# Altium PCB MAGI'sWiFi.PcbDoc
Units mil, origin at the board's own origin, x right, y up, seen from the top; angles counter-clockwise.
Board outline 6000 x 4000 mil, 2 copper layers (Top Layer, Bottom Layer); 20 components, 27 nets, 125 pads, 145 vias.
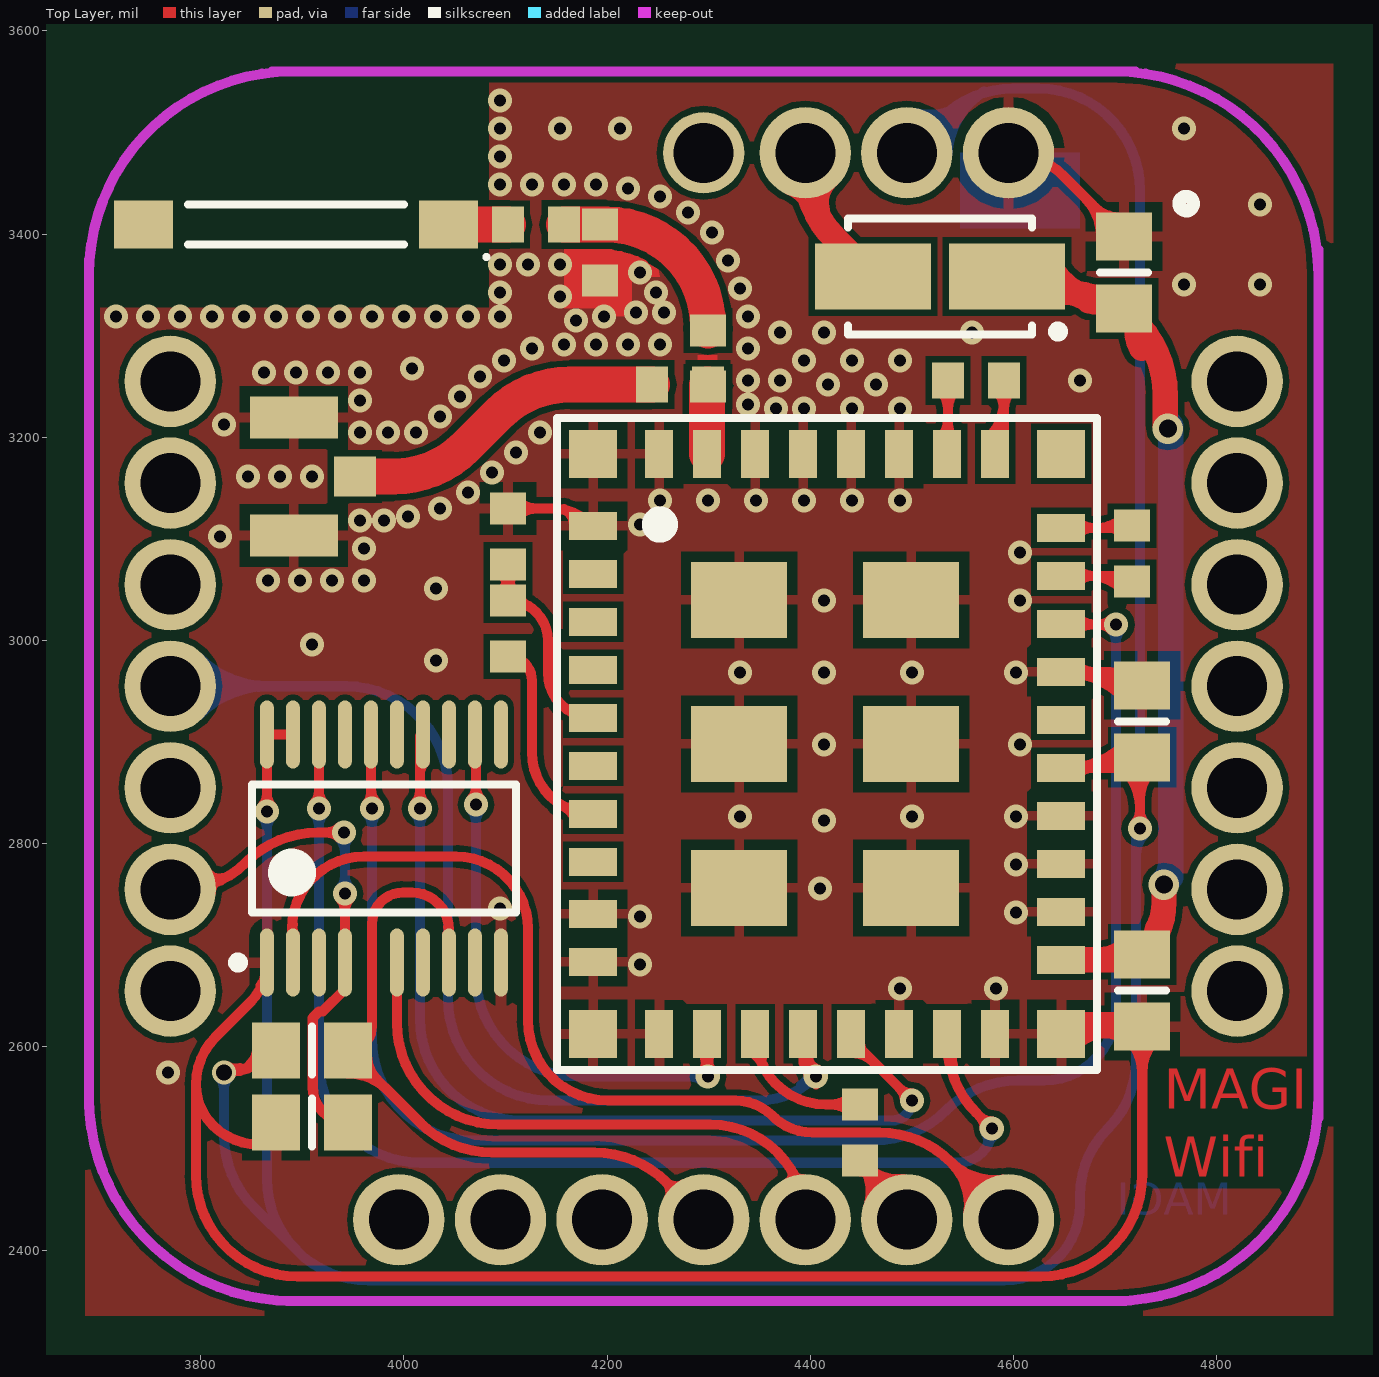
[diagram p0: Top Layer view]
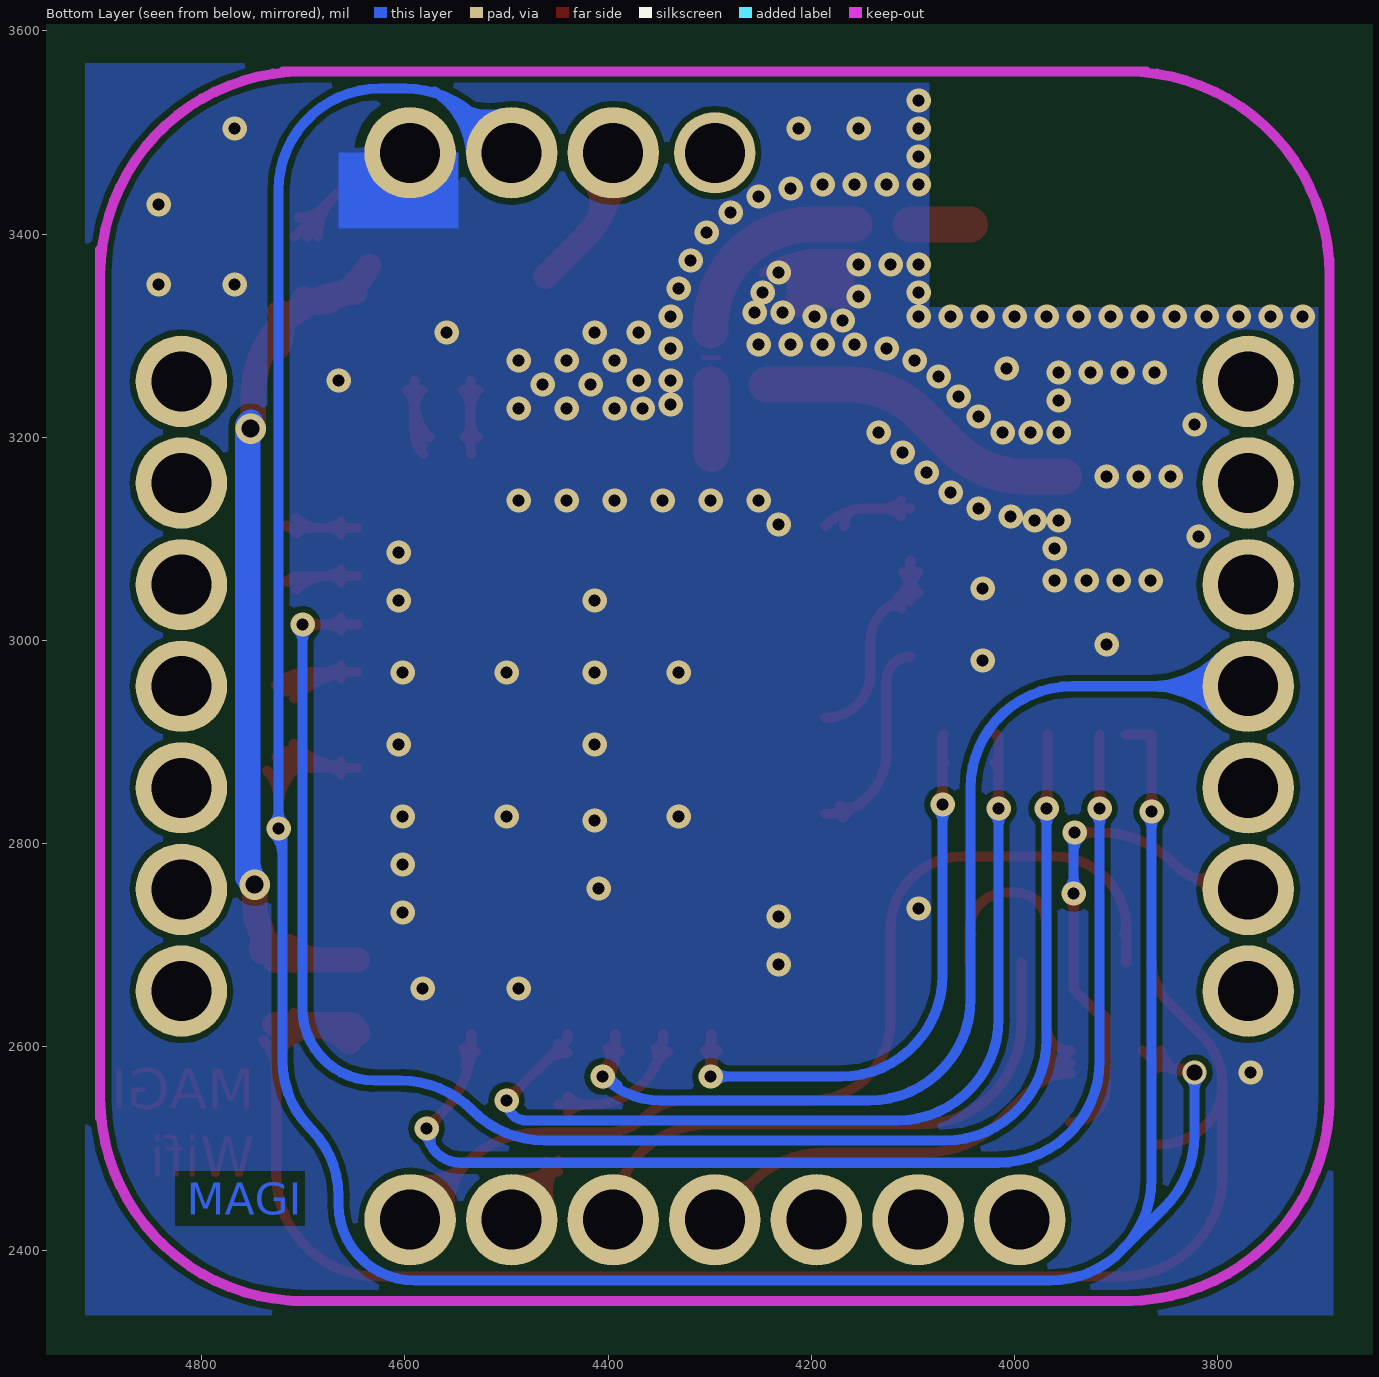
[diagram p1: Bottom Layer view, seen from below]

## Layer stack, top to bottom
Top Layer: signal copper 1.4
Dielectric: dielectric 12.6, FR-4, Dk 4.8
Bottom Layer: signal copper 1.4

## Board outline
1000,1000 7000,1000 7000,5000 1000,5000

## Design rules (kind name [scope] priority, off if disabled: settings)
Clearance Clearance_1 [InPolygon vs InNetClass('RF')] p1: gap=6
Clearance [All] p2: gap=6
ComponentClearance [All] p1 off: gap=10 collisioncheckmode=3 verticalgap=10 showdistances=FALSE
PolygonConnect [All] p1: connectstyle=Relief reliefconductorwidth=10 reliefentries=4 polygonreliefangle="90 Angle" airgapwidth=10
RoutingVias [All] p1: holewidth=28 width=50 viastyle="Through Hole" minholewidth=12 minwidth=24 maxholewidth=157.48 maxwidth=196.85
SolderMaskExpansion [All] p1: expansion=4
Width [All] p1: maxlimit=100 minlimit=6 preferedwidth=20
27 further rules are at their usual default settings.

## Classes and differential pairs
net class RF: NetC1_1 NetC1_2 NetC2_1 NetC3_2

## Components (designator, comment, footprint, x,y, rotation, side; value= is the part's Value field where it differs from the comment)
C1 "CAP_1" 1608[0603] 4129.92,3409.45 r180 top
C2 "CAP_1" 1608[0603] 4299.21,3277.56 r90 top
C3 "CAP_1" 1608[0603] 4271.65,3251.97 r180 top
C4 "CAP_1" 6-0805_N 4726.61,2920.51 r90 top
C5 "CAP_1" 6-0805_N 4726.61,2655.51 r270 top
D1 "DIODE_1" SMA 4527.56,3358.27 r180 top
E1 "1020B5812-01" AT8010-E2R9HAA 3893.7,3409.45 r180 top
E2 "ANT-2.45-CHP-B" U.FL 3901.57,3161.42 r90 top
J1 "MAGI-M8" MAGI-M8 4295,2955 r0 top
L2 "Coil" 1608[0603] 4192.91,3381.89 r90 top
M1 "CC3000" CC3000MOD 4416.61,2945.51 r0 top
R1 "RES1_1" 6-0805_N 3909.45,2525.59 r180 top
R2 "RES1_1" 6-0805_N 3909.45,2596.46 r180 top
R3 "RES1_1" 1608[0603] 4562.99,3255.91 r180 top
R4 "RES1_1" 1608[0603] 4716.61,3085.51 r270 top
R5 "RES1_1" 1608[0603] 4102.36,3102.36 r270 top
R6 "RES1_1" 1608[0603] 4102.36,3011.81 r270 top
R7 "RES1" 6-0805_N 4708.66,3362.2 r270 top
R8 "RES1_1" 1608[0603] 4448.82,2515.75 r90 top
U1 "SN74LVC244A" SN74LVC244APWRG 3980.32,2795.28 r90 top

## Footprints (in the part's own frame and the unit in brackets; to place one, negate y for a bottom-side part, rotate by r counter-clockwise, add the part's x,y. Pads: shape width x height; smd on the part's side, far side on the other; paste and mask are expansions set on the pad)
6-0805_N [mm] "Chip Resistor, Body 2.0x1.2mm, IPC Medium Density"
  rect 1.2x1.4 smd: 1(-0.9,0) 2(0.9,0)
  silkscreen extent 0,-0.6 0,0.6, body extent -1.07,-0.7 1.07,0.7, height 0.7
1608[0603] [mm] "Chip Capacitor, Body 1.6x0.8mm, IPC High Density"
  rect 0.8x0.9 smd: 1(-0.7,0) 2(0.7,0)
  body extent -0.87,-0.48 0.87,0.48, height 1.3
AT8010-E2R9HAA [mm] "Chip Inductor, 2-Leads, Body 8.00x1.00mm, IPC Medium Density"
  rect 1.48x1.2 smd: 1(-3.81,0) 2(3.81,0)
  silkscreen extent -4.81,-0.5 2.7,0.86, body extent -4.1,-0.6 4.1,0.6, height 1.2
CC3000MOD [mm]
  rect 1.2x0.7 smd: 1(-5.85,4.25) 2(-5.85,3.05) 3(-5.85,1.85) 4(-5.85,0.65) 5(-5.85,-0.55) 6(-5.85,-1.75) 7(-5.85,-2.95) 8(-5.85,-4.15) 9(-5.85,-5.45) 10(-5.85,-6.65) 19(5.85,-6.6) 20(5.85,-5.4) 21(5.85,-4.2) 22(5.85,-3) 23(5.85,-1.8) 24(5.85,-0.6) 25(5.85,0.6) 26(5.85,1.8) 27(5.85,3) 28(5.85,4.2)
  rect 0.7x1.2 smd: 11(-4.2,-8.45) 12(-3,-8.45) 13(-1.8,-8.45) 14(-0.6,-8.45) 15(0.6,-8.45) 16(1.8,-8.45) 17(3,-8.45) 18(4.2,-8.45) 29(4.2,6.05) 30(3,6.05) 31(1.8,6.05) 32(0.6,6.05) 33(-0.6,6.05) 34(-1.8,6.05) 35(-3,6.05) 36(-4.2,6.05)
  rect 2.4x1.9 smd: 37(-2.2,2.4) 38(-2.2,-1.2) 39(-2.2,-4.8) 40(2.1,2.4) 41(2.1,-1.2) 42(2.1,-4.8)
  rect 1.2x1.2 smd: 43(-5.85,6.05) 44(-5.85,-8.45) 45(5.85,-8.45) 46(5.85,6.05)
  silkscreen extent -6.75,-9.35 6.75,6.95
MAGI-M8 [mil]
  round 90 hole 59.06: 1(300,525) 2(200,525) 3(100,525) 8(-525,300) 9(-525,200) 10(-525,100) 11(-525,0) 12(-525,-100) 13(-525,-200) 14(-525,-300) 15(-300,-525) 16(-200,-525) 17(-100,-525) 18(0,-525) 19(100,-525) 20(200,-525) 21(300,-525) 22(525,-300) 23(525,-200) 24(525,-100) 25(525,0) 26(525,100) 27(525,200) 28(525,300)
  round 80 hole 59.06: 4(0,525)
  Keep-Out Layer lines w10: -605,-415 -605,290 -605,420 ; -605,-405 ccw(c-405,-405) -405,-605 ; -605,405 cw(c-405,405) -405,605 ; -425,605 425,605 ; -410,-605 415,-605 ; 405,-605 ccw(c405,-405) 605,-405 ; 405,605 cw(c405,405) 605,405 ; 605,-425 605,430
  silkscreen extent 468,468 482,482
SMA [mm] "Doide"
  rect 2.9x1.65 smd: 1(-1.675,0) 2(1.675,0)
  silkscreen extent -3.08,-1.45 2.3,1.5, body extent -2.3,-1.45 2.3,1.45, height 2.44
SN74LVC244APWRG [mm]
  oval 1.7x0.35 smd: 1(-2.85,2.925) 2(-2.85,2.275) 3(-2.85,1.625) 4(-2.85,0.975) 6(-2.85,-0.325) 7(-2.85,-0.975) 8(-2.85,-1.625) 9(-2.85,-2.275) 10(-2.85,-2.925) 11(2.85,-2.925) 12(2.85,-2.275) 13(2.85,-1.625) 14(2.85,-0.975) 15(2.85,-0.325) 16(2.85,0.325) 17(2.85,0.975) 18(2.85,1.625) 19(2.85,2.275) 20(2.85,2.925)
  silkscreen extent -2.97,-3.3 1.6,3.77, body extent -2.25,-3.3 2.25,3.3, height 1.2
U.FL [mm]
  rect 1x1.05 smd: 1(0,-1.27)
  rect 1.05x2.2 smd: 2(-1.475,0.255) 2(1.475,0.255)

## Part data
C1 C2 C3 C4 C5: "Capacitor"
D1: "Diode"
E1: "Flavus GSM Snap-In Antenna, 800/900/1800/1900 MHz, 0.8mm PCB Thickness"
E2: "2.45GHz Ultra-Compact, LTCC, Chip Antenna, Bulk"
U1: library part 74LVC244

## Via types
v1: diameter 24, hole 12, Top Layer to Bottom Layer, 142 vias
v2: diameter 30, hole 18, Top Layer to Bottom Layer, 2 vias
v3: diameter 23.62, hole 15.75, Top Layer to Bottom Layer, 1 vias

## Nets (pads, with @x,y where several pads share a name; then routed paths per layer and width w, separated by ;. In a path a pad name is that pad's centre, name@x,y a point inside that pad or via, vN(x,y) a via of type N, cw(c..) or ccw(c..) an arc to the next point about the centre after c; other vN are vias at no path point)
3.3V: C4.1 J1.2 M1.23 R2.2 U1.19 U1.20 | length 3827.5
  Top Layer w10: v3(3822.83,2574.8) ccw(c3822.83,2646.09) 3873.24,2595.68 R2.2 ; v3@3826.24,2580.7 ccw(c3834.46,2594.94) 3838.72,2579.06 ccw(c3842.97,2563.18) v3@3828.73,2571.4 ; R2.2@3855.75,2596.15 cw(c3829.44,2601.37) 3842.85,2578.14 cw(c3852.41,2561.58) R2.2@3863.35,2577.25 ; v1@3860.21,2836.64 ccw(c3848.26,2848.59) 3865.16,2848.59 ccw(c3882.06,2848.59) v1@3870.11,2836.64 ; v1(3865.16,2831.69) U1.20 U1.19 ; M1.23 4701.43,2874.65 ccw(c4701.43,2910.27) C4.1@4726.58,2885.04 ; M1.23@4652.53,2874.65 ccw(c4652.53,2955.22) C4.1@4709.51,2898.25 ; M1.23@4662.98,2868.44 cw(c4677.97,2853.45) 4677.97,2874.65 cw(c4677.97,2895.84) M1.23@4662.98,2880.85 ; 4676.67,2874.65 ccw(c4676.67,2931.08) C4.1@4716.58,2891.18 ; C4.1@4700.82,2874.65 ccw(c4700.82,2906.94) C4.1@4723.65,2884.1 ; C4.1@4709.51,2871.91 cw(c4673.54,2835.94) 4724.41,2835.94 ; C4.1@4716.58,2878.98 cw(c4697.68,2860.08) 4724.41,2860.08 ; v1@4719.46,2819.91 ccw(c4707.51,2831.86) 4724.41,2831.86 ccw(c4741.31,2831.86) v1@4729.36,2819.91 ; v1(4724.41,2814.96) C4.1@4724.41,2879.76 ; 4724.41,2844.3 cw(c4763.45,2844.3) C4.1@4735.84,2871.91
  Bottom Layer w10: v3@3818.02,2569.99 cw(c3806.39,2558.36) 3822.83,2558.36 cw(c3839.28,2558.36) v3@3827.65,2569.99 ; v3(3822.83,2574.8) 3822.83,2512.99 ccw(c3922.83,2512.99) 3852.12,2442.28 3888.3,2406.1 ; v1@3860.21,2826.74 cw(c3848.26,2814.79) 3865.16,2814.79 cw(c3882.06,2814.79) v1@3870.11,2826.74 ; v1(3865.16,2831.69) 3865.16,2470.08 ccw(c3965.16,2470.08) 3888.3,2406.1 ; J1.2 4529.02,3514.02 cw(c4599.73,3443.31) 4599.73,3543.31 4624.41,3543.31 cw(c4624.41,3443.31) 4724.41,3443.31 v1(4724.41,2814.96) 4720.47,2811.02 4720.47,2586.22 cw(c4626.38,2586.22) 4692.91,2519.68 ccw(c4759.45,2453.15) 4665.35,2453.15 4665.35,2444.88 cw(c4590.55,2444.88) 4590.55,2370.08 3965.16,2370.08 cw(c3965.16,2470.08) 3901.18,2393.22 3888.3,2406.1 ; J1.2@4501.68,3509.25 ccw(c4509.66,3544.21) 4528.74,3513.84 ; J1.2@4503.9,3519 ccw(c4517.26,3577.5) 4549.18,3526.69 ; J1.2@4514.98,3479.14 cw(c4565.98,3476.96) 4538.82,3520.18 ; J1.2@4524.97,3478.72 cw(c4589.09,3475.97) 4554.95,3530.31 ; J1.2@4534.96,3478.29 cw(c4612.21,3474.98) 4571.08,3540.44 ; v1@4719.46,2819.91 ccw(c4707.51,2831.86) 4724.41,2831.86 ccw(c4741.31,2831.86) v1@4729.36,2819.91 ; 4720.47,2788.56 cw(c4750.81,2788.56) v1@4729.36,2810.01
5V: D1.2 J1.3 | length 220.1
  Top Layer w25: J1.3@4382.51,3450 cw(c4366.45,3411.42) 4406.81,3422.24 cw(c4439.23,3430.92) J1.3@4416.76,3455.86 ; J1.3 4395,3466.3 ccw(c4495,3466.3) 4424.29,3395.59 D1.2
CLK_3V: M1.17 U1.18 | length 1306.7
  Top Layer w10: v1@3911.39,2839.6 ccw(c3899.44,2851.55) 3916.34,2851.55 ccw(c3933.24,2851.55) v1@3921.29,2839.6 ; v1(3916.34,2834.65) U1.18 ; M1.17@4530.11,2595.52 cw(c4518.09,2576.09) 4540.33,2581.34 ; M1.17 4534.72,2605.1 ccw(c4634.72,2605.1) 4564.01,2534.39 v1(4578.72,2519.68) ; 4539.8,2583.61 cw(c4558.82,2588.1) M1.17@4542.19,2598.38 ; v1@4571.72,2519.68 ccw(c4554.82,2519.68) 4566.77,2531.63 ccw(c4578.72,2543.58) v1@4578.72,2526.68
  Bottom Layer w10: v1@3911.39,2829.7 cw(c3899.44,2817.75) 3916.34,2817.75 cw(c3933.24,2817.75) v1@3921.29,2829.7 ; v1(3916.34,2834.65) 3916.34,2586 ccw(c4016.34,2586) 4016.34,2486 4545.03,2486 ccw(c4545.03,2519.68) v1(4578.72,2519.68) ; v1@4572.66,2516.18 cw(c4558.02,2507.74) 4574.34,2503.36 cw(c4590.67,2498.99) v1@4582.22,2513.62
CLK_5V: J1.21 U1.2 | length 1205.6
  Top Layer w10: 3890.59,2720.33 ccw(c3903.12,2717.61) U1.2@3892.34,2710.67 ; U1.2 cw(c3890.75,2684.06) 3889.76,2684.06 3889.76,2716.54 ; U1.2@3892.08,2710.99 cw(c3897.57,2716.53) 3889.76,2716.53 ; J1.21@4555.41,2435.72 ccw(c4496.34,2444.25) 4538.54,2486.46 ; J1.21@4565.31,2434.29 ccw(c4521.01,2440.69) 4552.66,2472.34 ccw(c4584.31,2503.99) J1.21@4590.71,2459.69 ; J1.21@4589.28,2469.59 cw(c4580.75,2528.66) 4538.54,2486.46 ; J1.21 4538.54,2486.46 ; 3889.76,2716.54 cw(c3960.63,2716.54) 3960.63,2787.4 4051.18,2787.4 cw(c4051.18,2716.54) 4122.05,2716.54 4122.05,2625.98 ccw(c4200.79,2625.98) 4200.79,2547.24 4326.2,2547.24 cw(c4326.2,2495.65) 4362.68,2532.13 ccw(c4402.23,2571.68) 4369.66,2526.21 ccw(c4402.23,2571.68) 4402.23,2515.75 4467.83,2515.75 cw(c4467.83,2415.75) 4538.54,2486.46
CS_3V: M1.12 U1.12 | length 736.3
  Top Layer w10: v1@4065.92,2843.53 ccw(c4053.97,2855.48) 4070.87,2855.48 ccw(c4087.77,2855.48) v1@4075.82,2843.53 ; U1.12@4068.55,2879.57 cw(c4062.94,2873.97) 4070.87,2873.97 ; U1.12 cw(c4067.51,2905.1) 4070.87,2905.1 v1(4070.87,2838.58) ; M1.12@4292.3,2596.78 cw(c4277.31,2581.8) 4298.5,2581.8 cw(c4319.7,2581.8) M1.12@4304.71,2596.78 ; v1@4293.76,2575.26 ccw(c4281.91,2584.84) 4296.63,2588.79 ; v1@4294.25,2575.81 ccw(c4283.99,2586.07) 4298.5,2586.07 ; M1.12@4298.5,2589.45 ccw(c4317.79,2589.45) v1@4304.15,2575.81 ; M1.12 4298.5,2570.87 v1(4299.2,2570.86) ; 4299.77,2586.53 ccw(c4308.82,2584.1) v1@4303.32,2576.53
  Bottom Layer w10: v1@4065.92,2833.63 cw(c4053.97,2821.68) 4070.87,2821.68 cw(c4087.77,2821.68) v1@4075.82,2833.63 ; v1(4070.87,2838.58) 4070.87,2670.86 ccw(c4170.87,2670.86) 4170.87,2570.86 v1(4299.2,2570.86) ; v1@4294.25,2565.91 ccw(c4282.3,2553.96) 4282.3,2570.86 ccw(c4282.3,2587.76) v1@4294.25,2575.81
CS_5V: J1.18 R2.1 U1.8 | length 833.7
  Top Layer w10: R2.1@3944.88,2573.9 cw(c3944.88,2519.44) 3983.39,2557.95 ; R2.1@3944.88,2583.9 cw(c3944.88,2553.58) R2.1@3966.32,2575.02 ; R2.1@3963.5,2592.52 ccw(c3998.96,2592.52) 3973.89,2567.45 ; U1.8@4042.65,2710.59 ccw(c4034.18,2715.48) 4043.63,2718.01 ; U1.8 4044.29,2715.55 ccw(c4007.87,2715.55) 4007.87,2751.97 3999.21,2751.97 ccw(c3999.21,2721.26) 3968.5,2721.26 3968.5,2620.08 cw(c3944.88,2620.08) R2.1 4015.99,2525.35 ccw(c4086.7,2596.06) 4086.7,2496.06 4187.52,2496.06 cw(c4187.52,2396.06) 4258.23,2466.77 ; J1.18@4260.41,2450.08 ccw(c4248.47,2457.01) 4258.23,2466.77 ; J1.18@4274.92,2464.59 cw(c4267.99,2476.53) 4258.23,2466.77 ; J1.18 4258.23,2466.77
EN_3V: M1.26 U1.16 | length 1717.5
  Top Layer w10: v1@3963.55,2839.6 ccw(c3953.98,2849.17) 3967.52,2849.17 ; 3967.52,2853.92 ccw(c3987.78,2853.92) v1@3973.45,2839.6 ; U1.16 3967.52,2837.02 ccw(c3970.88,2837.02) v1(3968.5,2834.65) ; M1.26 4646.93,3015.75 v1(4700.79,3015.75) ; M1.26@4662.98,3010.17 cw(c4676.45,2996.7) 4676.45,3015.75 ; M1.26@4662.98,3022.59 ccw(c4679.49,3039.09) 4679.49,3015.75 ; v1@4695.84,3010.8 ccw(c4683.89,2998.85) 4683.89,3015.75 ccw(c4683.89,3032.65) v1@4695.84,3020.7
  Bottom Layer w10: v1@3963.55,2829.7 cw(c3951.6,2817.75) 3968.5,2817.75 cw(c3985.4,2817.75) v1@3973.45,2829.7 ; v1(3968.5,2834.65) 3968.5,2607.87 ccw(c4068.5,2607.87) 4068.5,2507.87 4462.52,2507.87 ccw(c4462.52,2607.87) 4533.23,2537.16 4533.7,2537.64 cw(c4604.41,2466.93) 4604.41,2566.93 4629.92,2566.93 ccw(c4629.92,2637.8) 4700.79,2637.8 v1(4700.79,3015.75) ; v1@4695.84,3010.8 cw(c4683.89,2998.85) 4700.79,2998.85 cw(c4717.69,2998.85) v1@4705.74,3010.8
EN_5V: J1.13 R1.1 U1.4 | length 652.2
  Top Layer w10: J1.13 3780.18,2755 ccw(c3780.18,2846.28) 3844.73,2781.73 cw(c3915.44,2711.02) 3915.44,2811.02 v1(3940.94,2811.02) ; J1.13@3805.68,2773.07 ccw(c3817.87,2779.25) 3821.41,2766.05 ccw(c3825.45,2750.99) J1.13@3809.9,2752.11 ; v1@3936,2806.07 ccw(c3924.05,2794.12) 3924.05,2811.02 ccw(c3924.05,2827.92) v1@3936,2815.97 ; v1@3936.98,2746.03 cw(c3925.03,2734.08) 3941.93,2734.08 cw(c3958.83,2734.08) v1@3946.88,2746.03 ; v1@3940.94,2751.97 v1(3941.93,2750.98) U1.4 3941.93,2656.79 3920.16,2635.02 3916.7,2635.02 3910.26,2628.57 3910.26,2560.21 ccw(c3944.88,2560.21) R1.1
  Bottom Layer w10: v1@3936,2806.07 cw(c3921.67,2791.75) 3941.93,2791.75 ; v1@3936.98,2755.93 ccw(c3925.03,2767.88) 3941.93,2767.88 ccw(c3958.83,2767.88) v1@3946.88,2755.93 ; v1(3940.94,2811.02) 3941.93,2810.04 v1(3941.93,2750.98) ; 3941.93,2796.5 cw(c3955.47,2796.5) v1@3945.89,2806.07
GND: C4.2 C5.2 E2.2 J1.1 L2.1 M1.1 M1.9 M1.10 M1.11 M1.16 M1.18 M1.20 M1.21 M1.22 M1.25 M1.31 M1.32 M1.33 M1.34 M1.36 M1.37 M1.38 M1.39 M1.40 M1.41 M1.42 M1.43 M1.44 M1.45 R1.2 R5.1 R7.1 U1.1 U1.10 | length 2787.7
  Top Layer w9: 4204.96,3380.11 cw(c4194.57,3292.38) v1@4236.31,3370.25
  Top Layer w10: U1.1@3859.04,2660.25 cw(c3864.65,2658.75) U1.1@3863.36,2664.4 ; R1.2@3862.2,2503.94 3857.2,2503.94 cw(c3857.2,2567.88) 3811.98,2522.67 cw(c3852.3,2562.99) 3795.28,2562.99 ; U1.1 cw(c3810.51,2683.07) 3849.15,2644.43 3814.76,2610.04 ccw(c3861.81,2562.99) 3795.28,2562.99 ; R5.1 4145.05,3129.92 cw(c4145.05,3071.58) M1.1 ; R5.1@4111.93,3122.32 cw(c4130.28,3103.97) 4130.28,3129.92 cw(c4130.28,3155.87) R5.1@4111.93,3137.52 ; 4157.69,3129.35 cw(c4147.69,3112.03) M1.1@4167.68,3112.59 ; J1.1 cw(c4595,3404.44) 4648.43,3457.87 R7.1 ; M1.45 cw(c4664.42,2595.35) 4664.42,2620.08 C5.2 4726.61,2474 cw(c4626.61,2474) 4626.61,2374 3895.28,2374 cw(c3895.28,2474) 3795.28,2474 3795.28,2562.99 ; M1.45@4653.03,2606.74 cw(c4685.23,2574.53) 4685.23,2620.08 ; M1.45@4660.1,2599.67 cw(c4709.38,2550.39) C5.2@4709.38,2620.08 ; M1.45@4660.1,2626 ccw(c4674.4,2640.3) 4674.4,2620.08 ; M1.25@4662.98,2962.93 cw(c4677.97,2947.94) 4677.97,2969.13 cw(c4677.97,2990.33) M1.25@4662.98,2975.34 ; 4670.15,3436.15 cw(c4631.64,3397.64) R7.1@4686.1,3397.64 ; 4670.74,2969.13 cw(c4670.74,2905.02) C4.2@4716.52,2949.91 ; 4679.66,3426.64 ccw(c4704.72,3451.71) R7.1@4704.72,3416.26 ; 4680.29,2612.29 cw(c4689.15,2579.22) C5.2@4710.86,2605.68 ; 4686.39,2613.92 ccw(c4677.8,2645.99) C5.2@4706.55,2629.39 ; R7.1@4687.22,3419.08 cw(c4665.78,3397.64) R7.1@4696.1,3397.64 ; 4694.55,2969.13 cw(c4694.55,2928.37) C4.2@4723.66,2956.91 ; C5.2@4699.1,2617.32 cw(c4704.35,2597.74) C5.2@4717.21,2613.41 ; C4.2@4709.38,2942.91 ccw(c4646.93,2881.68) M1.25 4694.77,2969.13 cw(c4694.77,2924.1) C4.2 ; C5.2@4709.51,2606.91 ccw(c4677.72,2575.12) 4677.72,2620.08 ccw(c4677.72,2665.04) C5.2@4709.51,2633.25 ; C5.2@4713.45,2606.91 cw(c4681.66,2575.12) 4726.61,2575.12 cw(c4771.57,2575.12) C5.2@4739.78,2606.91
  Top Layer w25: M1.45 cw(c4656.14,2612.83) 4656.14,2622.05 C5.2@4728.35,2622.05 ; M1.45@4654.79,2604.97 cw(c4696.02,2563.74) 4696.02,2622.05 ; 4691.07,2622.05 cw(c4691.07,2588.48) C5.2@4714.81,2612.21
  other v1: 3767.72,2574.8 4488.19,2657.48 4582.68,2657.48 4232.28,2681.1 4232.28,2728.35 4602.36,2732.28 4094.49,2736.22 4409.45,2755.91 4602.36,2779.53 4413.39,2822.83 4330.71,2826.77 4500,2826.77 4602.36,2826.77 4413.39,2897.64 4606.3,2897.64 4330.71,2968.5 4413.39,2968.5 4500,2968.5 4602.36,2968.5 4031.5,2980.32 3909.45,2996.06 4413.39,3039.37 4606.3,3039.37 4031.5,3051.18 3866.14,3059.06 3897.64,3059.06 3929.13,3059.06 3960.63,3059.06 4606.3,3086.61 3960.63,3090.55 3818.9,3102.36 4232.28,3114.17 3956.69,3118.11 3980.32,3118.11 4003.94,3122.05 4035.43,3129.92 4251.97,3137.8 4299.21,3137.8 4346.46,3137.8 4393.7,3137.8 4440.94,3137.8 4488.19,3137.8 4062.99,3145.67 3846.46,3161.42 3877.95,3161.42 3909.45,3161.42 4086.61,3165.35 4110.24,3185.04 3956.69,3204.72 3984.25,3204.72 4011.81,3204.72 4133.86,3204.72 3822.83,3212.6 4035.43,3220.47 4366.14,3228.35 4393.7,3228.35 4440.94,3228.35 4488.19,3228.35 4338.58,3232.28 3956.69,3236.22 4055.12,3240.16 4417.32,3251.97 4464.57,3251.97 4338.58,3255.91 4370.08,3255.91 4665.35,3255.91 4074.8,3259.84 3862.2,3263.78 3893.7,3263.78 3925.2,3263.78 3956.69,3263.78 4007.87,3267.72 4098.43,3275.59 4393.7,3275.59 4440.94,3275.59 4488.19,3275.59 4125.98,3287.4 4338.58,3287.4 4157.48,3291.34 4188.98,3291.34 4220.47,3291.34 4251.97,3291.34 4370.08,3303.15 4413.39,3303.15 4559.06,3303.15 4169.29,3314.96 3716.54,3318.9 3748.03,3318.9 3779.53,3318.9 3811.02,3318.9 3842.52,3318.9 3874.02,3318.9 3905.51,3318.9 3937.01,3318.9 3968.5,3318.9 4000,3318.9 4031.5,3318.9 4062.99,3318.9 4094.49,3318.9 4196.85,3318.9 4338.58,3318.9 4228.35,3322.83 4255.91,3322.83 4153.54,3338.58 4094.49,3342.52 4248.03,3342.52 4330.71,3346.46 4767.72,3350.39 4842.52,3350.39 4232.28,3362.2 4094.49,3370.08 4122.05,3370.08 4153.54,3370.08 4318.9,3374.02 4303.15,3401.57 4279.53,3421.26 4842.52,3429.13 4251.97,3437.01 4220.47,3444.88 4094.49,3448.82 4125.98,3448.82 4157.48,3448.82 4188.98,3448.82 4094.49,3476.38 4094.49,3503.94 4153.54,3503.94 4212.6,3503.94 4767.72,3503.94 4094.49,3531.5
INT_3V: J1.11 M1.14 | length 1458.7
  Top Layer w10: M1.14@4388.6,2595.39 cw(c4382.32,2584.51) 4394.45,2587.76 ; M1.14 4392.99,2593.22 ccw(c4435.74,2593.22) 4405.51,2562.99 ccw(c4402.43,2562.99) 4404.61,2565.17 4405.5,2566.07 v1(4405.5,2570.86) ; 4393.32,2584.12 ccw(c4404.22,2590.41) v1@4405.05,2577.85 ; v1@4397.58,2576.08 cw(c4426.12,2583.73) M1.14@4400.58,2598.58 ; M1.14@4397.58,2591.37 ccw(c4412.14,2591.37) v1@4407.66,2577.52
  Bottom Layer w10: J1.11 3943.31,2955 cw(c3943.31,2855) 4043.31,2855 4043.31,2647.24 ccw(c4143.31,2647.24) 4143.31,2547.24 4348.49,2547.24 ccw(c4348.49,2627.88) v1(4405.5,2570.86) ; J1.11@3784.14,2940.86 cw(c3818.28,2906.72) 3818.28,2955 cw(c3818.28,3003.28) J1.11@3784.14,2969.14 ; J1.11@3791.21,2933.79 cw(c3842.43,2882.57) 3842.43,2955 cw(c3842.43,3027.43) J1.11@3791.21,2976.21 ; J1.11@3798.28,2926.72 cw(c3866.57,2858.43) 3866.57,2955 cw(c3866.57,3051.57) J1.11@3798.28,2983.28 ; v1@4398.74,2572.67 cw(c4382.42,2577.05) 4390.87,2562.41 cw(c4399.32,2547.78) v1@4403.69,2564.1
MISO_3V: M1.13 R8.2 | length 216.8
  Top Layer w10: M1.13@4341.36,2595.39 cw(c4326.41,2569.5) 4355.29,2577.24 ; M1.13 ccw(c4415.28,2612.83) 4415.28,2543.31 R8.2 ; 4352.1,2589.12 cw(c4364.18,2592.35) M1.13@4353.35,2598.6 ; R8.2@4439.25,2535.71 ccw(c4420.9,2517.36) 4420.9,2543.31 ccw(c4420.9,2569.26) R8.2@4439.25,2550.91
MOSI_3V: M1.15 U1.14 | length 1049
  Top Layer w10: v1@4010.8,2839.6 ccw(c3998.85,2851.55) 4015.75,2851.55 ccw(c4032.65,2851.55) v1@4020.7,2839.6 ; v1(4015.75,2834.65) 4015.75,2904.53 cw(c4018.7,2904.53) U1.14 ; 4015.75,2869.21 cw(c4030.39,2869.21) U1.14@4020.04,2879.57 ; M1.15@4440.24,2594.21 cw(c4440.24,2563.32) 4462.08,2585.16 ; M1.15 4440.24,2607.01 v1(4500,2547.24) ; M1.15@4449.02,2602.99 ccw(c4460.52,2602.99) M1.15@4452.38,2594.86 ; v1@4493,2547.24 ccw(c4476.1,2547.24) 4488.05,2559.19 ccw(c4500,2571.14) v1@4500,2554.24
  Bottom Layer w10: v1@4010.8,2829.7 cw(c3998.85,2817.75) 4015.75,2817.75 cw(c4032.65,2817.75) v1@4020.7,2829.7 ; v1(4015.75,2834.65) 4015.75,2627.56 ccw(c4115.75,2627.56) 4115.75,2527.56 4480.31,2527.56 ccw(c4480.31,2547.24) v1(4500,2547.24)
MOSI_5V: J1.19 U1.6 | length 597.7
  Top Layer w10: U1.6 3993.11,2623.62 ccw(c4093.11,2623.62) 4093.11,2523.62 4301.38,2523.62 cw(c4301.38,2430) J1.19 ; J1.19@4377.51,2465.97 ccw(c4373.42,2474.39) 4382.46,2476.81 ccw(c4391.49,2479.23) J1.19@4392.16,2469.9
NetC1_1: C1.1 C2.2 L2.2 | length 203.1
  Top Layer w35.43: C1.1 4199.21,3409.45 cw(c4199.21,3309.45) 4299.21,3309.45 C2.2
NetC1_2: C1.2 E1.1 | length 58.7
  Top Layer w35.43: E1.1 C1.2
NetC2_1: C2.1 C3.1 M1.35 | length 68.7
  Top Layer w35.43: M1.35 4298.5,3251.26 cw(c4299.21,3251.26) C3.1
NetC3_2: C3.2 E2.1 | length 321.4
  Top Layer w35.43: E2.1 3990.07,3161.42 ccw(c3990.07,3261.42) 4060.79,3190.71 4092.76,3222.68 cw(c4163.47,3151.97) 4163.47,3251.97 C3.2
NetC5_1: C5.1 D1.1 M1.19 R7.2 | length 1204.6
  Top Layer w10: M1.19 cw(c4659.67,2672.93) 4659.67,2690.94 C5.1 ; M1.19@4662.98,2679.46 cw(c4690.7,2651.74) 4690.7,2690.94 ; C5.1@4709.51,2677.78 ccw(c4677.72,2645.99) 4677.72,2690.94 ccw(c4677.72,2735.9) C5.1@4709.51,2704.11
  Top Layer w25: D1.1@4635.41,3368.26 ccw(c4698.38,3404.61) 4679.57,3334.38 ; M1.19 4728.35,2685.67 C5.1@4728.35,2685.04 ; D1.1@4649.18,3342.52 cw(c4649.18,3242.52) 4749.18,3242.52 4749.18,3211.45 v2(4751.97,3208.66) ; 4673.94,3334.56 ccw(c4684.25,3366.65) R7.2@4699.64,3336.67 ; 4683.09,2685.67 ccw(c4683.09,2730.53) C5.1@4714.81,2698.81 ; R7.2@4723.19,3323.37 ccw(c4768.04,3308.95) 4726.13,3287.43 ; C5.1 ccw(c4674.91,2742.65) 4748.03,2742.65 v2(4748.03,2759.84) ; C5.1@4741.22,2694.08 cw(c4775.48,2704.16) 4744.55,2722.02
  Bottom Layer w25: v2@4746.26,2761.61 ccw(c4725.39,2782.48) 4754.91,2782.48 ; v2(4748.03,2759.84) 4754.91,2766.72 4754.91,3211.96 4751.97,3214.9 v2(4751.97,3208.66)
NetJ1_20: J1.20 R8.1 | length 345.8
  Top Layer w10: R8.1@4449.56,2477.51 cw(c4447.19,2456.96) 4463.4,2469.82 ; J1.20@4456.99,2442.47 ccw(c4410.46,2457.74) R8.1 ; R8.1@4461.46,2486.96 ccw(c4492.47,2483.39) J1.20@4468.02,2463.99 ; R8.1@4462.74,2476.18 ccw(c4488.03,2487.14) J1.20@4491.37,2459.78 ; J1.20@4466.5,2439.35 ccw(c4431.59,2450.8) 4460.37,2473.64 ccw(c4489.14,2496.48) J1.20@4492.37,2459.88 ; 4466.9,2466.59 cw(c4436.88,2453.57) J1.20@4467.2,2441.27 ; J1.20@4491.49,2469.85 cw(c4487.18,2518.63) R8.1 ; J1.20 R8.1
NetM1_5: M1.5 R5.2 R6.1 | length 308.8
  Top Layer w10: R6.1@4094.76,3046.97 ccw(c4076.41,3065.32) 4102.36,3065.32 ccw(c4128.31,3065.32) R6.1@4109.96,3046.97 ; R5.2@4094.76,3067.2 cw(c4076.41,3048.86) 4102.36,3048.86 cw(c4128.31,3048.86) R5.2@4109.96,3067.2 ; R5.2@4102.36,3078.74 R6.1 cw(c4102.36,3000) 4141.73,3000 4141.73,2968.43 ccw(c4186.3,2968.43) M1.5 ; R6.1@4111.35,3031.23 cw(c4119.62,3021.62) 4122.9,3033.87 cw(c4125.88,3045) R6.1@4114.73,3042.09
NetM1_7: M1.7 R6.2 | length 234.7
  Top Layer w10: R6.2 cw(c4102.36,2960.63) 4125.98,2960.63 4125.98,2889.68 ccw(c4186.3,2889.68) M1.7 ; 4151.88,2838.59 cw(c4144.89,2812.5) M1.7@4168.71,2825.23 ; 4162.58,2835.72 ccw(c4165.82,2847.8) M1.7@4172.07,2836.97
NetM1_27: M1.27 R4.2 | length 156.7
  Top Layer w10: M1.27 4702.93,3063.62 cw(c4702.93,3044.27) R4.2 ; M1.27@4662.98,3057.41 cw(c4677.97,3042.43) 4677.97,3063.62 cw(c4677.97,3084.82) M1.27@4662.98,3069.83 ; 4675.01,3063.62 cw(c4675.01,3018.32) R4.2@4707.05,3050.35 ; R4.2@4699.15,3063.62 cw(c4699.15,3042.46) R4.2@4714.12,3057.42
NetM1_28: M1.28 R4.1 | length 144.3
  Top Layer w10: M1.28 4711.29,3110.87 ccw(c4711.29,3118.39) R4.1 ; M1.28@4662.98,3104.66 cw(c4677.97,3089.67) 4677.97,3110.87 cw(c4677.97,3132.06) M1.28@4662.98,3117.07 ; 4683.38,3110.87 ccw(c4683.38,3144.34) R4.1@4707.05,3120.67 ; 4694.02,3110.87 cw(c4694.02,3092.45) R4.1@4707.05,3105.47
NetM1_29: M1.29 R3.1 | length 175.6
  Top Layer w10: M1.29@4575.76,3199.75 ccw(c4540.05,3235.46) 4590.55,3235.46 ; M1.29 ccw(c4561.25,3204.42) 4590.55,3204.42 R3.1 ; M1.29@4582.83,3192.68 ccw(c4564.19,3211.32) 4590.55,3211.32 ; R3.1@4582.95,3246.34 cw(c4564.6,3227.99) 4590.55,3227.99 cw(c4616.5,3227.99) R3.1@4598.15,3246.34
NetM1_30: M1.30 R3.2 | length 146.4
  Top Layer w10: R3.2@4527.83,3246.34 cw(c4509.48,3227.99) 4535.43,3227.99 cw(c4561.38,3227.99) R3.2@4543.03,3246.34 ; M1.30@4528.52,3199.75 ccw(c4511.82,3216.45) 4535.43,3216.45 ; M1.30 ccw(c4533.01,3185.41) 4535.43,3185.41 R3.2 ; 4535.43,3213.03 ccw(c4554.21,3213.03) M1.30@4540.93,3199.75
TESTRXD: M1.8
TESTTXD: M1.6
pads on no net: E1.2 J1.4 J1.8 J1.9 J1.10 J1.12 J1.14 J1.15 J1.16 J1.17 J1.22 J1.23 J1.24 J1.25 J1.26 J1.27 J1.28 M1.2 M1.3 M1.4 M1.24 M1.46 U1.3 U1.7 U1.9 U1.11 U1.13 U1.15 U1.17

## Polygon pours and split planes (outlines as drawn)
GND on Top Layer "Bottom Layer-No Net" (solid, pour order 16): 3686.18,3327.48 4083.82,3327.48 4083.82,3567.64 4914.53,3567.64 4914.53,2335.35 3686.18,2335.35
GND on Bottom Layer "Bottom Layer-No Net" (solid, pour order 18): 3686.47,3328.15 4084.11,3328.15 4084.11,3568.31 4914.82,3568.31 4914.82,2336.02 3686.47,2336.02

## Other copper
Top Layer:
  rectangle net GND: 4289.07,3276.05 4308.47,3281.04
  rectangle net GND: 4157.48,3326.77 4204.72,3385.27
  rectangle net GND: 4197.91,3318.9 4224.41,3380.11
  region net GND: 4250.28,3365.58 4236.22,3374.02 4220.47,3374.02 4220.47,3358.27 4251.97,3358.27
  text "MAGI" at 4748.03,2539.37 h39.37
  text "Wifi" at 4748.03,2472.44 h39.37
Bottom Layer:
  rectangle net GND: 4547.24,3405.51 4665.35,3480.32

## Silkscreen, mask and mechanical layers (free items; w line width, h text height)
Top Overlay:
  circle w20: c4251.97,3114.17 r7.87

## Text inside footprints (layer, text, board x,y; h text height)
J1: Bottom Layer "MAGI" at 4815,2435 h31.5